# Altium PCB finalpcb.PcbDoc (part 2 of 2)
Units mm, origin at the board's own origin, x right, y up, seen from the top; angles counter-clockwise.
Board outline 242.29 x 217.3 mm, 4 copper layers (Top Layer, Layer 1, Layer 2, Bottom Layer), stack 0.563 mm thick; 53 components, 156 nets, 680 pads, 178 vias.
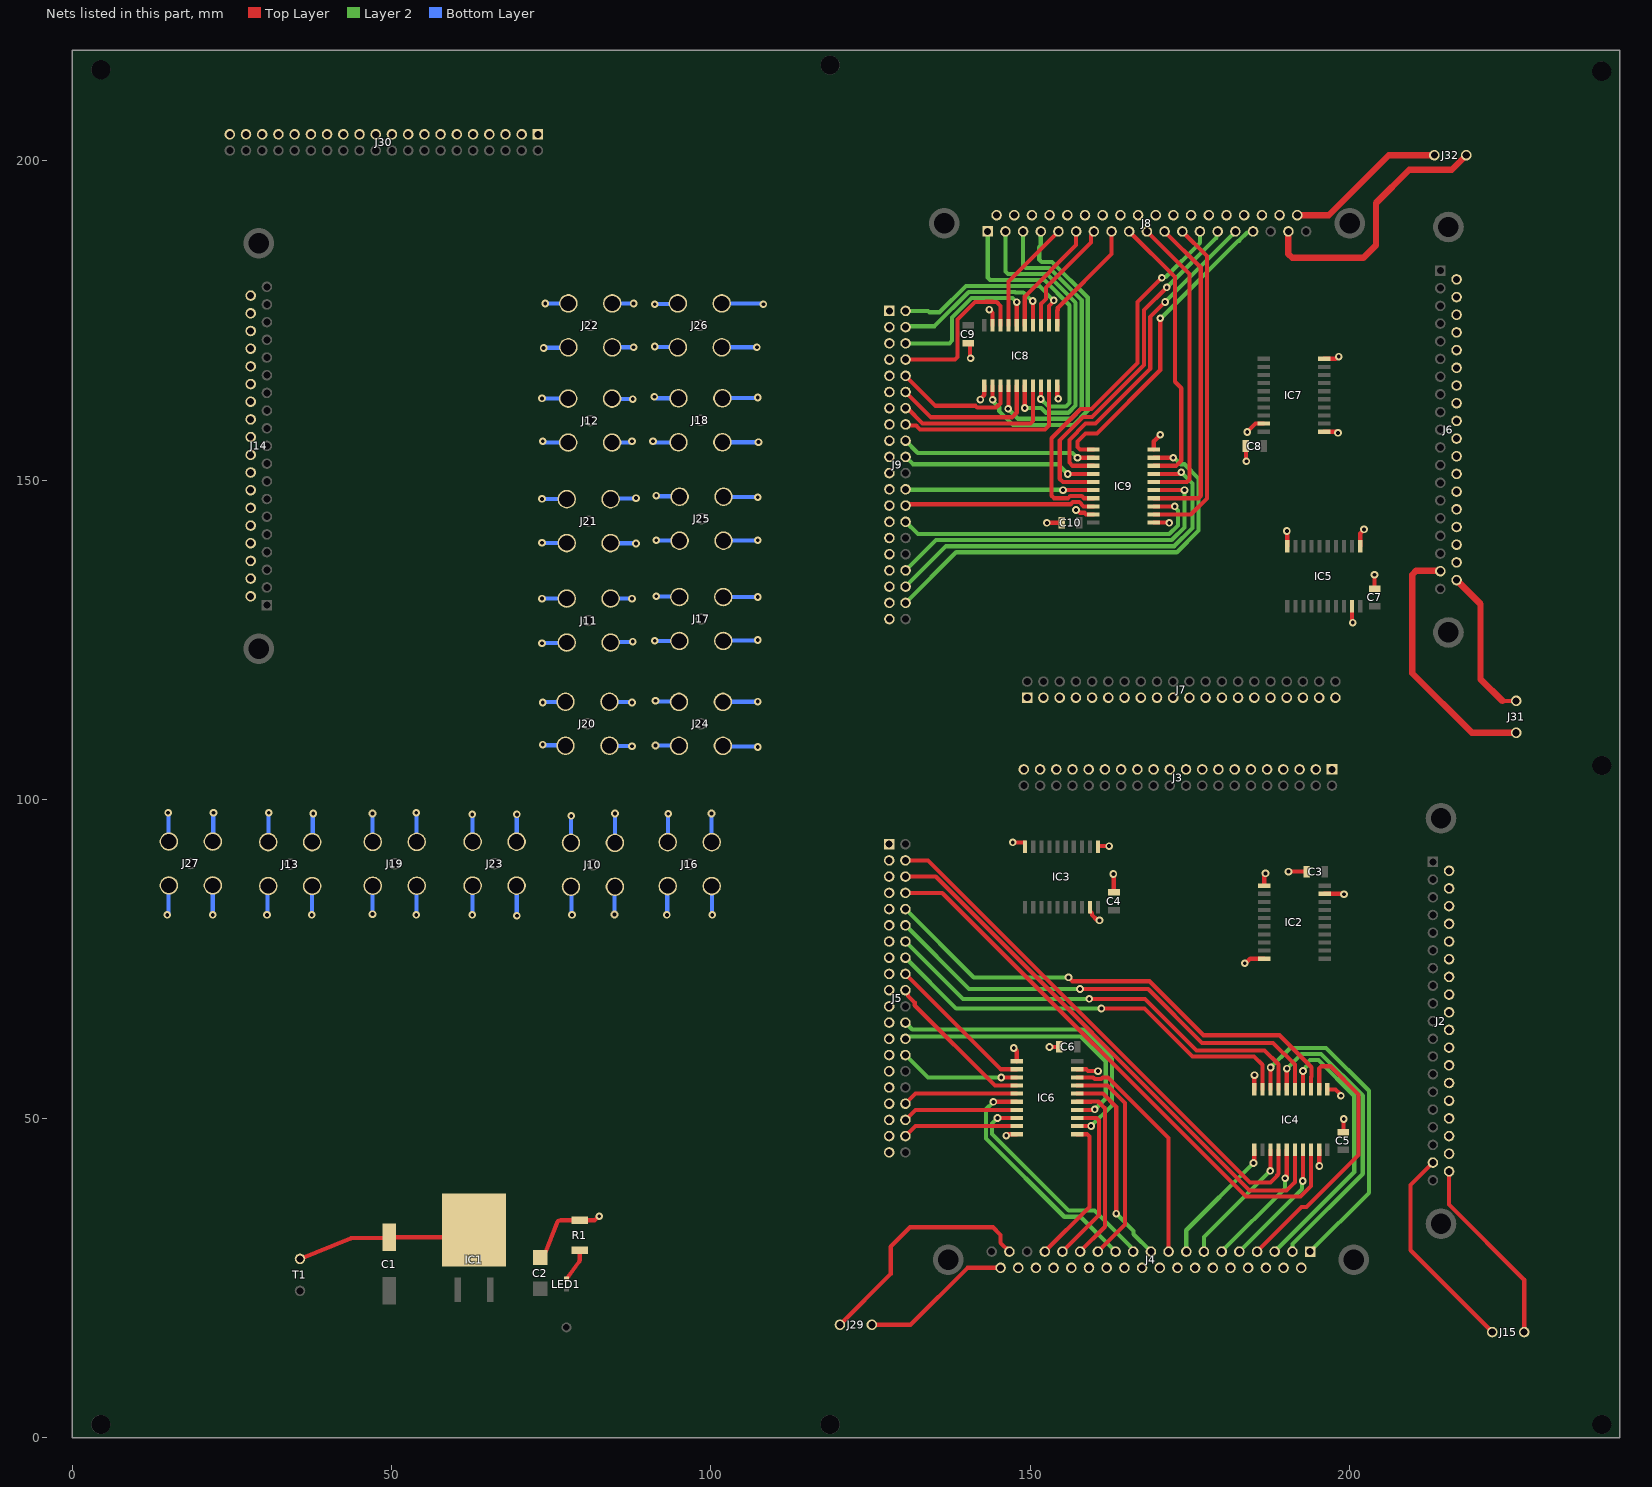
[diagram p4: the nets of this part, all layers, seen from the top]

## Via types
v1: diameter 1.2, hole 0.6, Top Layer to Bottom Layer, 178 vias

## Nets (pads, with @x,y where several pads share a name; then routed paths per layer and width w, separated by ;. In a path a pad name is that pad's centre, name@x,y a point inside that pad or via, vN(x,y) a via of type N, cw(c..) or ccw(c..) an arc to the next point about the centre after c; other vN are vias at no path point) (continued)
D16_inp_B: IC8.12 J9.2 | length 30.1
  Top Layer w0.65: IC8.12@152.959,174.245 152.959,177.296 153.67,178.007 v1(153.67,178.156)
  Layer 2 w0.65: J9.2@130.48,176.505 134.006,176.505 134.209,176.301 135.814,176.301 139.924,180.411 148.01,180.411 148.03,180.391 151.435,180.391 v1(153.67,178.156)
D16_out: IC4.8 J4.1 | length 51.9
  Top Layer w0.65: IC4.8@187.63,54.585 187.63,57.994 v1(187.65,58.014)
  Layer 2 w0.65: v1(187.65,58.014) 190.715,61.079 196.324,61.079 203.032,54.371 203.032,38.39 J4.1@193.827,29.185
D16_out_B: IC8.8 J8.1 | length 44.5
  Top Layer w0.65: v1(151.644,162.712) 151.689,162.757 IC8.8@151.689,164.795
  Layer 2 w0.65: J8.1@143.341,188.951 143.341,181.742 143.722,181.361 148.404,181.361 148.424,181.341 152.217,181.341 156.159,177.399 156.159,162.103 155.569,161.513 152.843,161.513 v1(151.644,162.712)
D17_inp: IC4.14 J5.4 | length 83.7
  Top Layer w0.65: J5.4@130.454,90.449 134.01,90.449 184.429,40.03 187.604,40.03 188.691,41.117 188.691,41.173 188.9,41.382 IC4.14@188.9,45.135
D17_inp_B: IC8.14 J9.4 | length 26.6
  Top Layer w0.65: v1(150.393,178.054) 150.419,178.029 IC8.14@150.419,174.245
  Layer 2 w0.65: J9.4@130.48,173.965 130.63,174.114 135.024,174.114 140.371,179.461 147.617,179.461 147.678,179.4 148.914,179.4 150.26,178.054 v1(150.393,178.054)
D17_out: IC4.6 J4.2 | length 47.8
  Top Layer w0.65: IC4.6@190.17,54.585 190.17,57.81 v1(190.195,57.836)
  Layer 2 w0.65: v1(190.195,57.836) 192.489,60.129 195.544,60.129 202.082,53.591 202.082,41.377 191.096,30.39 191.096,29.224 J4.2@191.057,29.185
D17_out_B: IC8.6 J8.2 | length 47.6
  Top Layer w0.65: v1(149.149,161.29) IC8.6@149.149,164.795
  Layer 2 w0.65: J8.2@146.111,188.951 146.111,182.692 146.492,182.311 148.877,182.311 148.897,182.291 152.611,182.291 157.109,177.792 157.109,161.709 155.963,160.563 152.45,160.563 151.723,161.29 v1(149.149,161.29)
D18_inp: IC4.16 J5.6 | length 87
  Top Layer w0.65: J5.6@130.454,87.909 135.204,87.909 184.353,38.76 190.144,38.76 191.44,40.056 IC4.16@191.44,45.135
D18_inp_B: IC8.16 J9.6 | length 26.4
  Top Layer w0.65: IC8.16@147.879,174.245 v1(147.879,177.876)
  Layer 2 w0.65: J9.6@130.48,171.425 137.338,171.425 137.77,171.856 137.77,175.489 140.792,178.511 147.223,178.511 147.858,177.876 v1(147.879,177.876)
D18_out: IC4.4 J4.3 | length 43.8
  Top Layer w0.65: IC4.4@192.71,54.585 v1(192.71,57.48)
  Layer 2 w0.65: J4.3@188.287,29.185 200.736,41.634 200.736,53.594 195.151,59.179 193.828,59.179 193.447,58.799 193.447,58.366 192.71,57.629 v1(192.71,57.48)
D18_out_B: IC8.4 J8.3 | length 50.1
  Top Layer w0.65: v1(146.533,161.188) 146.609,161.265 IC8.4@146.609,164.795
  Layer 2 w0.65: v1(146.533,161.188) 148.108,159.613 156.356,159.613 158.059,161.316 158.059,178.186 153.004,183.241 149.291,183.241 148.881,183.651 J8.3@148.881,188.951
D19_inp: IC4.18 J5.8 | length 89.6
  Top Layer w0.65: J5.8@130.454,85.369 136.22,85.369 183.794,37.795 192.303,37.795 193.98,39.472 IC4.18@193.98,45.135
D19_inp_B: IC8.18 J9.8 | length 25.4
  Top Layer w0.65: J9.8@130.48,168.885 138.239,168.885 138.622,169.268 138.622,175.153 141.352,177.882 143.028,177.882 143.079,177.933 144.094,177.933 144.144,177.882 144.755,177.882 145.339,177.298 IC8.18@145.339,174.245
D19_out: IC4.2 J4.4 | length 43.1
  Top Layer w0.65: J4.4@185.517,29.185 192.483,36.151 193.281,36.151 201.422,44.292 201.422,53.8 197.005,58.217 195.631,58.217 195.25,57.836 IC4.2@195.25,54.585
D19_out_B: IC8.2 J8.4 | length 52.3
  Top Layer w0.65: IC8.2@144.069,164.795 144.069,162.63 v1(144.114,162.585)
  Layer 2 w0.65: v1(144.114,162.585) 144.114,162.437 145.138,161.412 145.138,160.85 147.326,158.663 156.75,158.663 159.009,160.922 159.009,178.579 153.398,184.191 151.79,184.191 151.409,184.572 151.409,186.475 151.651,186.716 J8.4@151.651,188.951
D20_inp: IC4.3 J5.10 | length 77.4
  Top Layer w0.65: v1(155.981,72.136) 156.028,72.136 156.637,71.526 168.656,71.526 177.114,63.068 189.052,63.068 194.062,58.059 194.062,56.617 193.98,56.535 IC4.3@193.98,54.585
  Layer 2 w0.65: J5.10@130.454,82.829 141.148,72.136 v1(155.981,72.136)
D20_inp_B: IC8.3 J9.10 | length 20
  Top Layer w0.65: J9.10@130.48,166.345 135.179,161.646 141.422,161.646 141.707,161.36 144.627,161.36 144.912,161.646 144.958,161.646 145.339,162.026 IC8.3@145.339,164.795
D20_out: IC4.17 J4.5 | length 20.1
  Top Layer w0.65: v1(192.684,40.234) 192.71,40.259 IC4.17@192.71,45.135
  Layer 2 w0.65: J4.5@182.747,29.185 192.579,39.017 192.579,40.128 v1(192.684,40.234)
D20_out_B: IC8.17 J8.5 | length 17.9
  Top Layer w0.65: IC8.17@146.609,174.245 146.609,181.139 J8.5@154.421,188.951
D21_inp: IC4.5 J5.12 | length 73.9
  Top Layer w0.65: v1(157.785,70.301) 168.484,70.301 176.911,61.874 188.036,61.874 191.44,58.471 IC4.5@191.44,54.585
  Layer 2 w0.65: J5.12@130.454,80.289 140.411,70.333 157.754,70.333 v1(157.785,70.301)
D21_inp_B: IC8.5 J9.12 | length 23.6
  Top Layer w0.65: J9.12@130.48,163.805 134.442,159.842 147.168,159.842 147.879,160.553 IC8.5@147.879,164.795
D21_out: IC4.15 J4.6 | length 20.2
  Top Layer w0.65: v1(189.916,40.665) 190.17,40.919 IC4.15@190.17,45.135
  Layer 2 w0.65: J4.6@179.977,29.185 189.882,39.09 189.882,40.632 v1(189.916,40.665)
D21_out_B: IC8.15 J8.6 | length 18
  Top Layer w0.65: IC8.15@149.149,174.245 149.149,178.791 157.191,186.833 J8.6@157.191,188.951
D22_inp: IC4.7 J5.14 | length 70.3
  Top Layer w0.65: v1(159.233,68.758) 167.945,68.758 176.012,60.691 186.705,60.691 188.875,58.521 188.875,55.451 188.9,55.426 IC4.7@188.9,54.585
  Layer 2 w0.65: J5.14@130.454,77.749 139.446,68.758 v1(159.233,68.758)
D22_inp_B: IC8.7 J9.14 | length 26.6
  Top Layer w0.65: J9.14@130.48,161.265 130.75,161.265 133.123,158.892 150.028,158.892 150.419,159.283 IC8.7@150.419,164.795
D22_out: IC4.13 J4.7 | length 20.3
  Top Layer w0.65: v1(187.579,41.834) 187.63,41.885 IC4.13@187.63,45.135
  Layer 2 w0.65: J4.7@177.207,29.185 177.207,31.461 v1(187.579,41.834)
D22_out_B: IC8.13 J8.7 | length 18.1
  Top Layer w0.65: IC8.13@151.689,174.245 151.689,177.617 152.445,178.373 152.445,180.156 159.533,187.244 159.533,188.252 159.961,188.68 J8.7@159.961,188.951
D23_inp: IC4.9 J5.16 | length 66.7
  Top Layer w0.65: v1(161.138,67.259) 167.869,67.259 175.387,59.741 185.064,59.741 186.36,58.445 IC4.9@186.36,54.585
  Layer 2 w0.65: J5.16@130.454,75.209 138.405,67.259 v1(161.138,67.259)
D23_inp_B: IC8.9 J9.16 | length 29.3
  Top Layer w0.65: J9.16@130.48,158.725 130.671,158.533 132.138,158.533 132.729,157.942 152.329,157.942 152.959,158.572 IC8.9@152.959,164.795
D23_out: IC4.11 J4.8 | length 20.4
  Top Layer w0.65: v1(184.963,43.053) 184.963,43.202 185.09,43.329 IC4.11@185.09,45.135
  Layer 2 w0.65: J4.8@174.437,29.185 174.437,32.527 v1(184.963,43.053)
D23_out_B: IC8.11 J8.8 | length 18.2
  Top Layer w0.65: IC8.11@154.229,174.245 154.229,176.55 154.311,176.632 154.311,176.993 162.731,185.413 J8.8@162.731,188.951
D24_in_ex: IC6.18 J4.9 | length 36.2
  Top Layer w0.65: IC6.18@157.328,56.464 159.862,56.464 160.097,56.23 161.112,56.23 161.346,56.464 162.156,56.464 171.667,46.954 J4.9@171.667,29.185
D24_inp_B: IC9.12 J9.18 | length 30.5
  Top Layer w0.65: v1(157.404,153.518) IC9.12@159.892,153.518
  Layer 2 w0.65: J9.18@130.48,156.185 132.385,154.28 156.642,154.28 v1(157.404,153.518)
D24_op: IC6.2 J5.18 | length 23.6
  Top Layer w0.65: J5.18@130.454,72.669 145.39,57.734 IC6.2@147.878,57.734
D24_out_B: IC9.8 J8.9 | length 43.9
  Top Layer w0.65: J8.9@165.501,188.951 172.644,181.808 172.644,165.411 173.66,164.395 173.66,153.055 172.852,152.248 IC9.8@169.342,152.248
D25_in_ex: IC6.16 J4.10 | length 31.9
  Top Layer w0.65: IC6.16@157.328,53.924 161.366,53.924 163.474,51.816 v1(163.474,35.128)
  Layer 2 w0.65: v1(163.474,35.128) 166.18,32.423 166.18,31.902 J4.10@168.897,29.185
D25_inp_B: IC9.14 J9.20 | length 30.5
  Top Layer w0.65: v1(155.88,150.978) IC9.14@159.892,150.978
  Layer 2 w0.65: J9.20@130.48,153.645 131.623,152.502 154.356,152.502 v1(155.88,150.978)
D25_op: IC6.4 J5.20 | length 24.1
  Top Layer w0.65: J5.20@130.454,70.129 130.454,69.859 130.871,69.442 130.871,69.223 131.904,68.19 131.904,67.765 144.475,55.194 IC6.4@147.878,55.194
D25_out_B: IC9.6 J8.10 | length 47.4
  Top Layer w0.65: J8.10@168.271,188.951 174.93,182.292 174.93,150.088 174.549,149.708 IC9.6@169.342,149.708
D26_inp: IC6.12 J5.24 | length 48.9
  Top Layer w0.65: IC6.12@157.328,48.844 v1(159.532,48.844)
  Layer 2 w0.65: J5.24@130.454,65.049 131.521,63.983 158.496,63.983 161.536,60.942 161.536,60.714 162.779,59.471 162.779,52.092 v1(159.532,48.844)
D26_inp_B: IC9.16 J9.24 | length 29.5
  Top Layer w0.65: v1(155.118,148.438) 155.144,148.464 158.47,148.464 158.496,148.438 IC9.16@159.892,148.438
  Layer 2 w0.65: J9.24@130.48,148.565 130.543,148.501 155.054,148.501 v1(155.118,148.438)
D26_out: IC6.8 J4.11 | length 35.8
  Top Layer w0.65: v1(144.882,50.114) IC6.8@147.878,50.114
  Layer 2 w0.65: v1(144.882,50.114) 144.018,49.251 144.018,47.6 156.022,35.596 160.061,35.596 165.676,29.98 165.676,29.905 166.127,29.455 J4.11@166.127,29.185
D26_out_B: IC9.4 J8.11 | length 51.3
  Top Layer w0.65: IC9.4@169.342,147.168 176.327,147.168 176.708,147.548 176.708,183.284 J8.11@171.041,188.951
D27_inp: IC6.14 J5.26 | length 44.2
  Top Layer w0.65: IC6.14@157.328,51.384 160.02,51.384 v1(160.096,51.46)
  Layer 2 w0.65: J5.26@130.454,62.509 130.725,62.509 131.106,62.89 157.912,62.89 161.829,58.973 161.829,53.193 v1(160.096,51.46)
D27_inp_B: IC9.18 J9.26 | length 29.9
  Top Layer w0.65: J9.26@130.48,146.025 130.671,146.216 131.349,146.216 131.361,146.228 156.332,146.228 156.668,146.564 157.683,146.564 158.349,145.898 IC9.18@159.892,145.898
D27_out: IC6.6 J4.12 | length 37.5
  Top Layer w0.65: v1(144.221,52.629) 144.247,52.654 IC6.6@147.878,52.654
  Layer 2 w0.65: v1(144.221,52.629) 143.068,51.476 143.068,46.901 155.324,34.646 157.896,34.646 J4.12@163.357,29.185
D27_out_B: IC9.2 J8.12 | length 52.8
  Top Layer w0.65: IC9.2@169.342,144.628 175.131,144.628 177.658,147.155 177.658,185.104 J8.12@173.811,188.951
D28_inp: IC6.3 J5.28 | length 18.9
  Top Layer w0.65: v1(145.466,56.439) 145.491,56.464 IC6.3@147.878,56.464
  Layer 2 w0.65: J5.28@130.454,59.969 133.985,56.439 v1(145.466,56.439)
D28_inp_B: IC9.3 J9.28 | length 50.5
  Top Layer w0.65: IC9.3@169.342,145.898 v1(172.644,145.898)
  Layer 2 w0.65: J9.28@130.48,143.485 132.405,141.559 171.771,141.559 173.126,142.915 173.126,145.266 172.644,145.749 v1(172.644,145.898)
D28_out: IC6.17 J4.13 | length 33.7
  Top Layer w0.65: IC6.17@157.328,55.194 162.083,55.194 164.826,52.45 164.826,33.424 J4.13@160.587,29.185
D28_out_B: IC9.17 J8.13 | length 59.3
  Top Layer w0.65: IC9.17@159.892,147.168 158.422,147.168 158.076,147.514 156.274,147.514 155.938,147.178 153.721,147.178 153.34,147.559 153.34,156.566 157.912,161.138 159.616,161.138 166.802,168.323 166.802,177.902 v1(170.612,181.712)
  Layer 2 w0.65: v1(170.612,181.712) 170.717,181.817 171.225,181.817 176.581,187.173 J8.13@176.581,188.951
D29_inp: IC6.5 J5.34 | length 18.1
  Top Layer w0.65: J5.34@130.454,52.349 132.029,53.924 IC6.5@147.878,53.924
D29_inp_B: IC9.5 J9.34 | length 57.1
  Top Layer w0.65: IC9.5@169.342,148.438 v1(174.168,148.438)
  Layer 2 w0.65: J9.34@130.48,135.865 135.225,140.609 172.164,140.609 174.168,142.613 v1(174.168,148.438)
D29_out: IC6.15 J4.14 | length 28.9
  Top Layer w0.65: IC6.15@157.328,52.654 159.558,52.654 159.589,52.685 160.604,52.685 160.635,52.654 160.68,52.654 161.707,51.628 161.707,33.075 J4.14@157.817,29.185
D29_out_B: IC9.15 J8.14 | length 55.3
  Top Layer w0.65: IC9.15@159.892,149.708 155.118,149.708 154.61,150.216 154.61,156.185 158.293,159.868 159.69,159.868 167.833,168.011 167.833,176.647 v1(171.374,180.188)
  Layer 2 w0.65: v1(171.374,180.188) 179.159,187.973 179.159,188.759 J8.14@179.351,188.951
D30_inp: IC6.7 J5.36 | length 18.1
  Top Layer w0.65: J5.36@130.454,49.809 132.029,51.384 IC6.7@147.878,51.384
D30_inp_B: IC9.7 J9.36 | length 62.6
  Top Layer w0.65: IC9.7@169.342,150.978 173.257,150.978 173.511,151.232 v1(173.66,151.232)
  Layer 2 w0.65: J9.36@130.48,133.325 136.815,139.659 172.558,139.659 175.393,142.494 175.393,149.499 v1(173.66,151.232)
D30_out: IC6.13 J4.15 | length 26.5
  Top Layer w0.65: J4.15@155.047,29.185 160.757,34.895 160.757,49.733 160.376,50.114 IC6.13@157.328,50.114
D30_out_B: IC9.13 J8.15 | length 51.8
  Top Layer w0.65: IC9.13@159.892,152.248 156.642,152.248 156.134,152.756 156.134,156.312 158.674,158.852 160.198,158.852 168.783,167.437 168.783,175.565 v1(171.12,177.902)
  Layer 2 w0.65: v1(171.12,177.902) 171.12,177.926 182.121,188.927 J8.15@182.121,188.951
D31_inp: IC6.9 J5.38 | length 18.1
  Top Layer w0.65: J5.38@130.454,47.269 132.029,48.844 IC6.9@147.878,48.844
D31_inp_B: IC9.9 J9.38 | length 67.1
  Top Layer w0.65: IC9.9@169.342,153.518 v1(172.39,153.518)
  Layer 2 w0.65: J9.38@130.48,130.785 138.405,138.709 172.951,138.709 176.343,142.101 176.343,150.281 174.131,152.493 173.563,152.493 172.539,153.518 v1(172.39,153.518)
D31_out: IC6.11 J4.16 | length 23
  Top Layer w0.65: J4.16@152.277,29.185 159.258,36.166 159.258,47.193 158.877,47.574 IC6.11@157.328,47.574
D31_out_B: IC9.11 J8.16 | length 49.4
  Top Layer w0.65: IC9.11@159.892,154.788 157.785,154.788 157.404,155.168 157.404,156.058 158.674,157.328 160.452,157.328 170.358,167.234 v1(170.358,175.362)
  Layer 2 w0.65: v1(170.358,175.362) 170.507,175.362 182.646,187.501 182.721,187.501 183.98,188.759 184.699,188.759 J8.16@184.891,188.951
GND_R: C1.2 C2.1 C3.2 C4.2 C5.2 C6.2 C7.2 C8.2 C9.2 C10.2 IC1.2 IC2.1 IC2.10 IC2.19 IC3.1 IC3.10 IC3.19 IC4.1 IC4.10 IC4.19 IC5.1 IC5.10 IC5.19 IC6.1 IC6.10 IC6.19 IC7.1 IC7.10 IC7.19 IC8.1 IC8.10 IC8.19 IC9.1 IC9.10 IC9.19 J2.20 J2.21 J2.22 J2.23 J2.24 J2.25 J2.26 J2.27 J2.28 J2.29 J2.30 J2.31 J2.32 J2.33 J2.34 J2.35 J2.36 J3.1 J3.3 J3.5 J3.7 J3.9 J3.11 J3.13 J3.15 J3.17 J3.19 J3.21 J3.23 J3.25 J3.27 J3.29 J3.31 J3.33 J3.35 J3.37 J3.39 J4.20 J4.21 J4.22 J4.23 J4.24 J4.25 J4.26 J4.27 J4.28 J4.29 J4.30 J4.31 J4.32 J4.33 J4.34 J4.35 J4.36 J5.1 J5.3 J5.5 J5.7 J5.9 J5.11 J5.13 J5.15 J5.17 J5.19 J5.21 J5.23 J5.25 J5.27 J5.29 J5.31 J5.33 J5.35 J5.37 J5.39 J6.20 J6.21 J6.22 J6.23 J6.24 J6.25 J6.26 J6.27 J6.28 J6.29 J6.30 J6.31 J6.32 J6.33 J6.34 J6.35 J6.36 J7.1 J7.3 J7.5 J7.7 J7.9 J7.11 J7.13 J7.15 J7.17 J7.19 J7.21 J7.23 J7.25 J7.27 J7.29 J7.31 J7.33 J7.35 J7.37 J7.39 J8.20 J8.21 J8.22 J8.23 J8.24 J8.25 J8.26 J8.27 J8.28 J8.29 J8.30 J8.31 J8.32 J8.33 J8.34 J8.35 J8.36 J9.1 J9.3 J9.5 J9.7 J9.9 J9.11 J9.13 J9.15 J9.17 J9.19 J9.21 J9.23 J9.25 J9.27 J9.29 J9.31 J9.33 J9.35 J9.37 J9.39 J10.2 J10.3 J10.4 J10.5 J11.2 J11.3 J11.4 J11.5 J12.2 J12.3 J12.4 J12.5 J13.2 J13.3 J13.4 J13.5 J14.20 J14.21 J14.22 J14.23 J14.24 J14.25 J14.26 J14.27 J14.28 J14.29 J14.30 J14.31 J14.32 J14.33 J14.34 J14.35 J14.36 J14.37 J16.2 J16.3 J16.4 J16.5 J17.2 J17.3 J17.4 J17.5 J18.2 J18.3 J18.4 J18.5 J19.2 J19.3 J19.4 J19.5 J20.2 J20.3 J20.4 J20.5 J21.2 J21.3 J21.4 J21.5 J22.2 J22.3 J22.4 J22.5 J23.2 J23.3 J23.4 J23.5 J24.2 J24.3 J24.4 J24.5 J25.2 J25.3 J25.4 J25.5 J26.2 J26.3 J26.4 J26.5 J27.2 J27.3 J27.4 J27.5 J30.1 J30.3 J30.5 J30.7 J30.9 J30.11 J30.13 J30.15 J30.17 J30.19 J30.21 J30.23 J30.25 J30.27 J30.29 J30.31 J30.33 J30.35 J30.37 J30.39 R1.1 T1.1 | length 398
  Top Layer w0.65: T1.1@35.636,28.038 43.527,31.248 cw(c43.772,30.646) 43.772,31.296 48.856,31.296 C1.2@49.606,31.438 61.765,31.438 IC1.2@62.89,32.563 ; C2.1@73.279,28.256 74.104,29.081 75.862,33.669 cw(c76.469,33.437) 76.469,34.087 R1.1@79.451,34.087 81.737,34.087 82.372,34.722 v1(82.499,34.722) ; C9.2@140.284,171.445 140.375,171.445 140.56,171.26 140.56,169.193 v1(140.665,169.088) ; v1(142.189,162.611) 142.189,162.76 142.799,163.369 IC8.1@142.799,164.795 ; v1(143.586,176.708) 144.069,176.225 IC8.19@144.069,174.245 ; v1(146.253,47.346) cw(c146.482,47.346) 146.482,47.574 IC6.10@147.878,47.574 ; v1(147.269,93.269) 147.304,93.234 149.2,93.234 IC3.10@149.2,92.584 ; v1(147.422,61.062) cw(c147.422,60.816) 147.595,60.99 147.777,60.808 cw(c147.535,60.565) 147.878,60.565 IC6.1@147.878,59.004 ; v1(152.603,143.307) 152.629,143.332 154.886,143.332 C10.2@154.912,143.358 ; v1(153.01,61.239) 153.022,61.252 154.515,61.252 C6.2@154.528,61.265 ; IC8.10@154.229,164.795 154.229,163.039 154.381,162.887 v1(154.381,162.738) ; v1(157.175,145.339) 157.324,145.339 157.77,144.893 158.48,144.893 158.745,144.628 IC9.19@159.892,144.628 ; IC6.19@157.328,57.734 158.778,57.734 159.029,57.483 160.576,57.483 v1(160.604,57.455) ; IC3.19@159.36,83.134 159.36,82.484 159.68,82.164 159.68,81.9 160.42,81.159 160.73,81.159 v1(160.835,81.054) ; IC3.1@160.63,92.584 160.63,92.685 v1(162.357,92.685) ; v1(163.017,88.316) 163.068,88.265 163.068,85.499 C4.2@163.119,85.449 ; IC9.1@169.342,143.358 171.729,143.358 v1(171.78,143.307) ; IC9.10@169.342,154.788 169.342,156.088 170.358,157.104 v1(170.358,157.124) ; v1(183.591,74.346) 183.74,74.346 184.451,75.057 IC2.10@186.639,75.057 ; C8.2@183.718,155.39 C8.2@183.762,155.346 183.804,155.305 183.804,153 v1(183.845,152.959) ; v1(183.972,157.531) 185.293,158.852 IC7.19@186.562,158.852 ; IC4.10@185.09,54.585 185.09,56.794 v1(185.115,56.82) ; IC2.1@186.639,86.487 186.639,87.925 cw(c187.334,87.925) v1(186.842,88.417) ; v1(190.195,142.037) 190.246,141.986 IC5.10@190.246,139.675 ; v1(190.449,88.697) C3.2@193.289,88.697 ; IC4.19@195.25,45.135 195.25,42.621 v1(195.275,42.596) ; IC7.1@196.012,157.582 197.87,157.582 198.047,157.404 v1(198.196,157.404) ; IC7.10@196.012,169.012 197.844,169.012 198.174,169.342 v1(198.323,169.342) ; IC2.19@196.089,85.217 199.065,85.217 v1(199.13,85.152) ; IC4.1@196.52,54.585 197.82,54.585 198.548,53.857 198.548,53.699 v1(198.653,53.594) ; C5.2@199.034,47.907 199.06,47.933 199.06,49.936 v1(199.085,49.962) ; IC5.19@200.406,130.225 200.406,127.779 v1(200.499,127.686) ; IC5.1@201.676,139.675 201.676,141.625 202.26,142.209 v1(202.26,142.291) ; v1(203.911,135.179) 203.937,135.153 203.937,133.051 C7.2@203.962,133.025
  Bottom Layer w0.65: v1(14.859,81.915) 14.859,82.064 15.043,82.248 15.043,86.468 J27.3@15.1,86.525 ; v1(14.986,97.917) 15.043,97.86 15.043,93.466 J27.2@15.1,93.408 ; v1(21.971,81.915) 21.977,81.921 21.977,86.519 J27.4@21.984,86.525 ; J27.5@21.984,93.408 22.041,93.466 22.041,97.86 v1(22.098,97.917) ; v1(30.48,81.915) 30.569,82.004 30.569,86.347 J13.3@30.658,86.436 ; J13.2@30.658,93.32 30.696,93.358 30.696,97.879 v1(30.734,97.917) ; v1(37.465,81.915) 37.503,81.953 37.503,86.398 J13.4@37.541,86.436 ; J13.5@37.541,93.32 37.63,93.408 37.63,97.701 v1(37.719,97.79) ; v1(46.99,82.042) 47.009,82.061 47.009,86.455 J19.3@47.028,86.474 ; v1(46.99,97.79) 47.009,97.771 47.009,93.377 J19.2@47.028,93.358 ; v1(53.848,81.915) 53.88,81.947 53.88,86.443 J19.4@53.911,86.474 ; v1(53.848,97.917) 53.88,97.885 53.88,93.389 J19.5@53.911,93.358 ; v1(62.611,81.915) 62.643,81.947 62.643,86.468 J23.3@62.674,86.5 ; v1(62.611,97.663) 62.643,97.631 62.643,93.415 J23.2@62.674,93.383 ; J23.4@69.558,86.5 69.577,86.481 69.577,81.807 v1(69.596,81.788) ; J23.5@69.558,93.383 69.577,93.402 69.577,97.644 v1(69.596,97.663) ; v1(73.533,124.46) 73.59,124.517 77.349,124.517 J11.3@77.406,124.574 ; v1(73.533,131.445) 73.539,131.451 77.4,131.451 J11.2@77.406,131.458 ; v1(73.533,140.208) 73.565,140.176 77.375,140.176 J21.3@77.406,140.144 ; v1(73.533,147.066) 73.552,147.047 77.387,147.047 J21.2@77.406,147.028 ; v1(73.533,162.814) 73.552,162.795 77.616,162.795 J12.2@77.635,162.776 ; v1(73.66,108.585) 73.749,108.496 77.127,108.496 J20.3@77.216,108.407 ; v1(73.66,115.189) 73.711,115.24 77.165,115.24 J20.2@77.216,115.291 ; v1(73.66,156.083) 73.809,156.083 73.999,155.892 J12.3@77.635,155.892 ; v1(73.787,170.688) 73.844,170.745 77.603,170.745 J22.3@77.66,170.802 ; v1(74.041,177.673) 74.047,177.679 77.654,177.679 J22.2@77.66,177.686 ; J10.3@78.067,86.322 78.149,86.239 78.149,81.998 v1(78.232,81.915) ; J10.2@78.067,93.205 78.086,93.224 78.086,97.402 v1(78.105,97.421) ; J20.4@84.099,108.407 84.138,108.369 87.592,108.369 v1(87.63,108.331) ; J20.5@84.099,115.291 84.123,115.267 87.552,115.267 v1(87.63,115.189) ; J11.4@84.29,124.574 84.36,124.644 87.687,124.644 v1(87.757,124.714) ; J11.5@84.29,131.458 84.296,131.451 87.624,131.451 v1(87.63,131.445) ; J21.4@84.29,140.144 84.322,140.113 88.233,140.113 v1(88.265,140.081) ; J21.5@84.29,147.028 84.372,147.11 88.182,147.11 v1(88.265,147.193) ; J12.4@84.519,155.892 87.291,155.892 87.481,156.083 v1(87.63,156.083) ; J12.5@84.519,162.776 84.563,162.731 87.713,162.731 v1(87.757,162.687) ; J22.4@84.544,170.802 84.55,170.809 87.878,170.809 v1(87.884,170.815) ; J22.5@84.544,177.686 84.55,177.679 87.878,177.679 v1(87.884,177.673) ; v1(84.893,81.972) 84.893,86.265 J10.4@84.95,86.322 ; J10.5@84.95,93.205 84.957,93.212 84.957,97.784 v1(84.963,97.79) ; v1(90.932,156.083) 91.081,156.083 91.278,155.886 94.85,155.886 J18.3@94.907,155.943 ; v1@91.059,163.068 91.208,163.068 91.449,162.827 J18.2@94.907,162.827 ; v1(91.186,124.841) 91.199,124.828 95.034,124.828 J17.3@95.047,124.816 ; v1(91.186,170.942) 91.256,170.872 94.736,170.872 J26.3@94.805,170.802 ; v1(91.186,177.546) 91.256,177.616 94.736,177.616 J26.2@94.805,177.686 ; v1(91.313,108.458) 91.345,108.426 94.952,108.426 J24.3@94.983,108.394 ; v1(91.313,115.443) 91.396,115.36 94.901,115.36 J24.2@94.983,115.278 ; v1(91.44,131.826) 91.504,131.762 94.983,131.762 J17.2@95.047,131.699 ; v1(91.44,140.589) 91.504,140.525 J25.3@95.085,140.525 ; v1(91.44,147.574) 91.523,147.491 95.002,147.491 J25.2@95.085,147.409 ; v1(93.091,81.915) 93.161,81.985 93.161,86.354 J16.3@93.231,86.423 ; J16.2@93.231,93.307 93.288,93.364 93.288,97.733 v1(93.304,97.749) ; v1(100.076,97.79) 100.095,97.771 100.095,93.326 J16.5@100.114,93.307 ; J16.4@100.114,86.423 100.159,86.379 100.159,81.959 v1(100.203,81.915) ; J26.4@101.689,170.802 101.695,170.809 107.182,170.809 v1(107.188,170.815) ; J26.5@101.689,177.686 108.064,177.686 cw(c108.064,177.546) v1(108.204,177.546) ; J18.4@101.79,155.943 107.442,155.943 v1(107.442,155.956) ; J18.5@101.79,162.827 101.848,162.884 107.258,162.884 v1(107.315,162.941) ; J24.4@101.867,108.394 101.962,108.299 107.22,108.299 v1(107.315,108.204) ; J24.5@101.867,115.278 101.886,115.297 107.296,115.297 v1(107.315,115.316) ; J17.4@101.93,124.816 102.006,124.892 107.239,124.892 v1(107.315,124.968) ; J17.5@101.93,131.699 v1(107.315,131.699) ; J25.4@101.968,140.525 102,140.557 107.283,140.557 v1(107.315,140.589) ; J25.5@101.968,147.409 102.013,147.364 107.271,147.364 v1(107.315,147.32)
  other v1: 91.133,163.068
NetLED1_2: LED1.2 R1.2 | length 5.2
  Top Layer w0.65: LED1.2@77.368,24.856 77.443,24.931 79.33,27.567 ccw(c78.801,27.945) 79.451,27.945 79.451,29.141 R1.2@79.451,29.413
Vrtn1: J2.37 J15.1 | length 30
  Top Layer w0.65: J2.37@215.595,41.738 215.595,36.541 227.355,24.781 J15.1@227.355,16.586
Vrtn1_B: J6.37 J31.1 | length 24.1
  Top Layer w0.65: 223.952,115.418 226.085,115.418 J31.1@226.111,115.443
  Top Layer w1: J6.37@216.764,134.355 220.523,130.596 220.523,118.847 223.952,115.418
Vrtn2: J4.37 J29.1 | length 23.9
  Top Layer w0.65: J29.1@125.193,17.729 131.239,17.729 140.155,26.645 J4.37@145.352,26.645
Vrtn2_B: J8.37 J32.1 | length 25.4
  Top Layer w1: J8.37@191.816,191.491 196.765,191.491 206.163,200.889 J32.1@213.284,200.889
Vuser1: J2.18 J15.2 | length 33.3
  Top Layer w0.65: J2.18@213.055,43.123 209.55,39.618 209.55,29.392 J15.2@222.355,16.586
Vuser1_B: J6.18 J31.2 | length 40.3
  Top Layer w1: J6.18@214.224,135.74 214.173,135.791 210.415,135.791 209.829,135.205 209.829,119.761 219.173,110.418 226.085,110.418 J31.2@226.111,110.443
Vuser2: J4.18 J29.2 | length 37.7
  Top Layer w0.65: J29.2@120.193,17.729 128.143,25.679 128.143,29.947 131.191,32.995 144.171,32.995 145.358,31.807 145.358,30.563 J4.18@146.737,29.185
Vuser2_B: J8.18 J32.2 | length 42.1
  Top Layer w1: J8.18@190.431,188.951 190.431,185.422 191.017,184.836 202.184,184.836 204.14,186.792 204.14,193.396 209.347,198.603 215.998,198.603 J32.2@218.284,200.889
pads on no net: J2.17 J2.19 J2.MH1 J2.MH2 J3.22 J3.30 J3.32 J3.40 J4.17 J4.19 J4.MH1 J4.MH2 J5.22 J5.30 J5.32 J5.40 J6.17 J6.19 J6.MH1 J6.MH2 J7.22 J7.30 J7.32 J7.40 J8.17 J8.19 J8.MH1 J8.MH2 J9.22 J9.30 J9.32 J9.40 J14.17 J14.18 J14.19 J14.MH1 J14.MH2 J30.34 J30.36 J30.38 J30.40

## Polygon pours and split planes (outlines as drawn)
GND_R on Layer 1 "GND_R_L02_P000" (solid, pour order 0): 6.35,10.16 ccw(c6.858,10.16) 6.858,9.652 231.14,9.652 ccw(c231.14,12.192) 233.68,12.192 233.68,207.01 ccw(c231.14,207.01) 231.14,209.55 8.89,209.55 ccw(c8.89,207.01) 6.35,207.01

## Keep-outs
Keep-Out Layer:
  rectangle: 184.405,45.76 197.205,53.26
  region: 195.114,74.372 195.114,87.172 187.614,87.172 187.614,74.372
  rectangle: 142.241,165.617 155.041,173.117
  region: 194.961,156.897 194.961,169.697 187.461,169.697 187.461,156.897
  region: 168.469,142.8 168.469,155.6 160.969,155.6 160.969,142.8
  rectangle: 189.536,131.124 202.336,138.624
  region: 161.315,91.259 148.515,91.259 148.515,83.759 161.315,83.759
  region: 156.003,46.889 156.003,59.689 148.503,59.689 148.503,46.889

## Silkscreen, mask and mechanical layers (free items; w line width, h text height)
Top Overlay:
  drawing of 73 lines, arcs and shapes, not listed
  text "AIN00" at 72.492,197.079 h1.52 r270
  text "AIN01" at 69.875,197.002 h1.52 r270
  text "AIN06" at 57.302,196.926 h1.52 r270
  text "AIN07" at 54.737,196.875 h1.52 r270
  text "AIN04" at 62.382,196.875 h1.52 r270
  text "AIN15" at 34.468,196.799 h1.52 r270
  text "AIN05" at 59.741,196.799 h1.52 r270
  text "AIN03" at 64.948,196.723 h1.52 r270
  text "AIN02" at 67.437,196.723 h1.52 r270
  text "AIN12" at 42.113,196.672 h1.52 r270
  text "AIN09" at 49.809,196.672 h1.52 r270
  text "AIN08" at 52.248,196.672 h1.52 r270
  text "AIN14" at 37.033,196.596 h1.52 r270
  text "AIN13" at 39.548,196.596 h1.52 r270
  text "AIN10" at 47.168,196.596 h1.52 r270
  text "AIN11" at 44.526,196.393 h1.52 r270
  text "D16_B" at 115.824,175.87 h1.52
  text "D17_B" at 115.824,173.33 h1.52
  text "AIN15" at 33.985,171.215 h1.52
  text "D18_B" at 115.824,170.79 h1.52
  text "AIN14" at 34.061,168.445 h1.52
  text "D19_B" at 115.824,168.25 h1.52
  text "D20_B" at 115.697,165.71 h1.52
  text "AIN13" at 34.138,165.675 h1.52
  text "AIN12" at 34.188,163.525 h1.52
  text "D21_B" at 115.824,163.17 h1.52
  text "D22_B" at 115.697,160.63 h1.52
  text "AIN11" at 34.138,160.477 h1.52
  text "D23_B" at 135.636,157.988 h1.52
  text "AIN10" at 34.061,157.365 h1.52
  text "D24_B" at 135.636,155.702 h1.52
  text "AIN09" at 34.188,154.595 h1.52
  text "D25_B" at 135.636,152.248 h1.52
  text "AIN08" at 34.188,151.825 h1.52
  text "AIN07" at 33.985,149.055 h1.52
  text "D26_B" at 135.636,148.285 h1.52
  text "AIN06" at 34.468,146.285 h1.52
  text "D27_B" at 135.636,145.593 h1.52
  text "AIN05" at 34.138,143.515 h1.52
  text "D28_B" at 135.636,142.977 h1.52
  text "AIN04" at 34.265,140.745 h1.52
  text "AIN03" at 34.188,137.975 h1.52
  text "D29_B" at 135.636,135.687 h1.52
  text "AIN02" at 34.188,135.205 h1.52
  text "D30_B" at 135.636,133.096 h1.52
  text "AIN01" at 34.188,132.435 h1.52
  text "D31_B" at 135.763,130.607 h1.52
  text "AIN00" at 34.188,129.665 h1.52
  text "D09_B" at 173.025,122.606 h1.52 r90
  text "D05_B" at 162.865,122.53 h1.52 r90
  text "D00_B" at 150.165,122.504 h1.52 r90
  text "D06_B" at 165.405,122.479 h1.52 r90
  text "D11_B" at 180.645,122.479 h1.52 r90
  text "D13_B" at 190.46,122.479 h1 r90
  text "D04_B" at 160.325,122.453 h1.52 r90
  text "D10_B" at 178.105,122.453 h1.52 r90
  text "D03_B" at 157.785,122.403 h1.52 r90
  text "D07_B" at 167.945,122.403 h1.52 r90
  text "D08_B" at 170.485,122.403 h1.52 r90
  text "D12_B" at 183.185,122.403 h1.52 r90
  text "D14_B" at 192.797,122.403 h1 r90
  text "D15_B" at 195.871,122.403 h1 r90
  text "D01_B" at 152.705,122.375 h1.52 r90
  text "D02_B" at 155.245,122.375 h1.52 r90
  text "D15" at 150.917,111.506 h1.24 r270
  text "D14" at 153.457,111.506 h1.24 r270
  text "D13" at 155.997,111.506 h1.24 r270
  text "D00" at 196.495,98.171 h1.52 r270
  text "D02" at 191.415,98.12 h1.52 r270
  text "D01" at 193.955,98.12 h1.52 r270
  text "D03" at 188.875,98.095 h1.52 r270
  text "D12" at 163.475,98.044 h1.52 r270
  text "D11" at 166.015,98.044 h1.52 r270
  text "D10_op" at 168.809,98.044 h1.52 r270
  text "D09_op" at 173.889,98.044 h1.52 r270
  text "D08" at 176.175,98.044 h1.52 r270
  text "D07" at 178.715,98.044 h1.52 r270
  text "D06" at 181.255,98.044 h1.52 r270
  text "D05" at 183.795,98.044 h1.52 r270
  text "D04" at 186.335,98.044 h1.52 r270
  text "D16" at 134.363,92.001 h1.52
  text "D17" at 134.442,89.484 h1.52
  text "D18" at 134.442,87.071 h1.52
  text "D19" at 134.366,84.607 h1.52
  text "D20" at 134.442,81.864 h1.52
  text "D21" at 134.363,79.428 h1.52
  text "D22" at 134.363,76.888 h1.52
  text "D23" at 134.363,74.348 h1.52
  text "D24_op" at 134.363,72.316 h1.52
  text "D25_op" at 134.363,69.776 h1.52
  text "D26" at 134.363,64.069 h1.52
  text "D27" at 134.366,61.798 h1.52
  text "D28" at 134.442,58.852 h1.52
  text "D29" at 134.366,52.426 h1.52
  text "D30" at 134.363,49.098 h1.52
  text "D31" at 134.468,46.457 h1.52
  text "-" at 25.07,27.276 h1.52
  text "+" at 24.968,21.895 h1.52
Board:
  lines w0.2: 0,0 0,217.297 242.291,217.297 242.291,0.025 242.265,0 0,0

## Text inside footprints (layer, text, board x,y; h text height)
IC1: Top Overlay "*" at 56.858,22.555 h1.27; Mechanical 13 "*" at 60.033,26.924 h1.27